# Altium PCB EMG_indicator.PcbDoc
Units mil, origin at the board's own origin, x right, y up, seen from the top; angles counter-clockwise.
Board outline 6000 x 4000 mil, 2 copper layers (Top Layer, Bottom Layer); 53 components, 31 nets, 141 pads, 0 vias.
Unrouted connection lines stored in the file: 104.
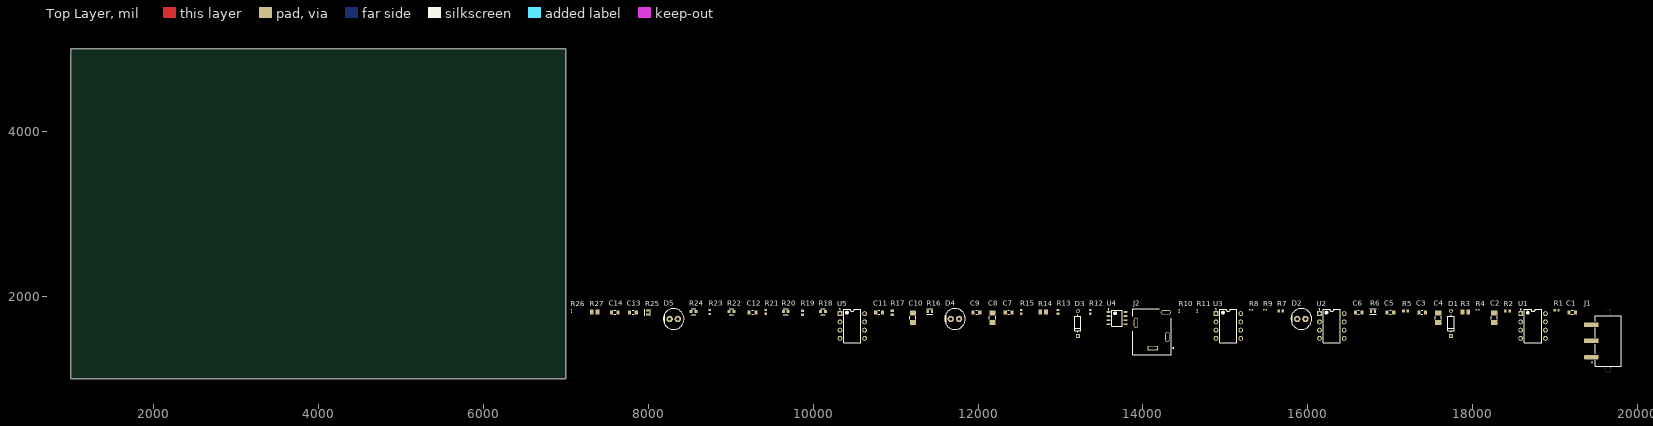
[diagram p0: Top Layer view]
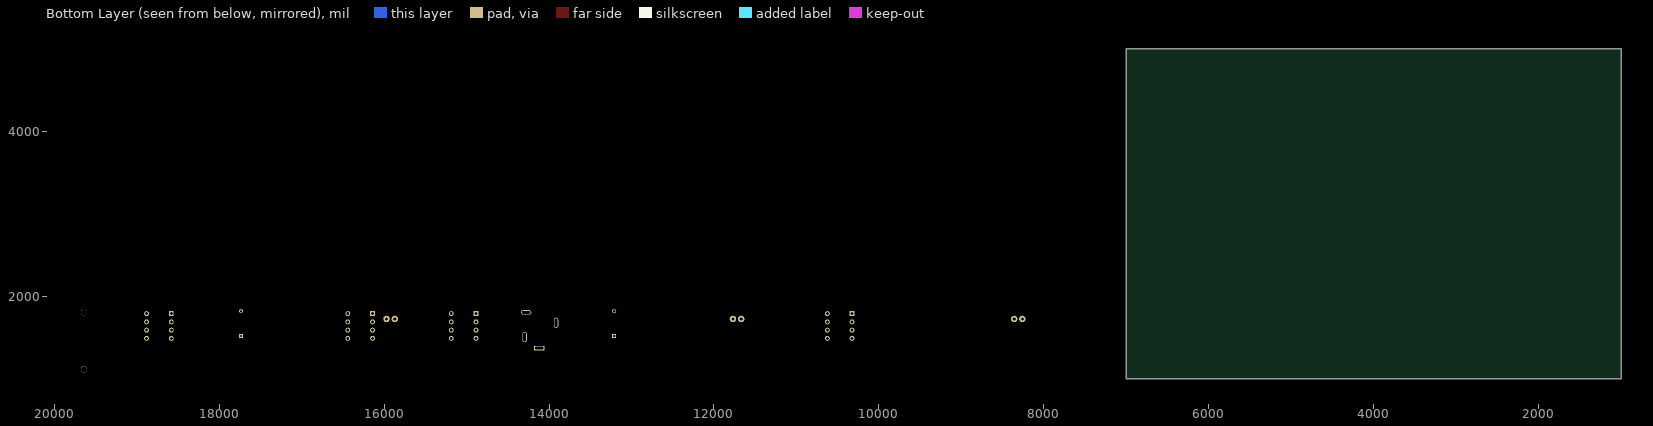
[diagram p1: Bottom Layer view, seen from below]

## Layer stack, top to bottom
Top Solder: solder mask 0.4, Solder Resist, Dk 3.5
Top Layer: signal copper 1.4
Dielectric 1: dielectric 12.6, FR-4, Dk 4.8
Bottom Layer: signal copper 1.4
Bottom Solder: solder mask 0.4, Solder Resist, Dk 3.5

## Board outline
1000,1000 7000,1000 7000,5000 1000,5000

## Design rules (kind name [scope] priority, off if disabled: settings)
Clearance [All] p1: gap=10 ignorepadtopadclearanceinfootprint=FALSE
PolygonConnect [All] p1: connectstyle=Relief reliefconductorwidth=10 reliefentries=4 polygonreliefangle="90 Angle" airgapwidth=10
RoutingVias [All] p1: holewidth=28 width=50 viastyle="Through Hole" minholewidth=28 minwidth=50 maxholewidth=28 maxwidth=50
SolderMaskExpansion [All] p1: expansion=4 istentingtop=FALSE
Width [All] p1: maxlimit=10 minlimit=10 preferedwidth=10
30 further rules are at their usual default settings.

## Components (designator, comment, footprint, x,y, rotation, side; value= is the part's Value field where it differs from the comment)
C1 "100nF" FP-CGA3E-0_3-0_1-IPC_A 19205,1805 r0 top
C2 "68nF" FP-1206-L_3_2_0_2-W_1_6_0-IPC_A 18260,1740 r90 top
C3 "100nF" FP-CGA3E-0_3-0_1-IPC_A 17385,1805 r0 top
C4 "68nF" FP-1206-L_3_2_0_2-W_1_6_0-IPC_A 17580,1740 r90 top
C5 "100nF" FP-CGA3E-0_3-0_1-IPC_A 17000,1805 r0 top
C6 "100nF" FP-CGA3E-0_3-0_1-IPC_A 16615,1805 r0 top
C7 "100nF" FP-CGA3E-0_3-0_1-IPC_A 12370,1805 r0 top
C8 "68nF" FP-1206-L_3_2_0_2-W_1_6_0-IPC_A 12175,1740 r90 top
C9 "100nF" FP-CGA3E-0_3-0_1-IPC_A 11980,1805 r0 top
C10 "68nF" FP-1206-L_3_2_0_2-W_1_6_0-IPC_A 11210,1740 r90 top
C11 "100nF" FP-CGA3E-0_3-0_1-IPC_A 10800,1805 r0 top
C12 "100nF" FP-CGA3E-0_3-0_1-IPC_A 9265,1805 r0 top
C13 "100nF" FP-CGA3E-0_3-0_1-IPC_A 7815,1805 r0 top
C14 "100nF" FP-CGA3E-0_3-0_1-IPC_A 7595,1805 r0 top
D1 "1N4148" FP-017AG-MFG 17735,1670 r90 top
D2 "SFH 4550" FP-SFH_4550-MFG 15920,1725 r0 top
D3 "1N4148" FP-017AG-MFG 13210,1670 r90 top
D4 "SFH 4550" FP-SFH_4550-MFG 11720,1725 r0 top
D5 "SFH 4550" FP-SFH_4550-MFG 8310,1725 r0 top
J1 "691709710303" 691709710303 19640,1460 r90 top
J2 "35RAPC3BH3" FP-35RAPC3BH3-MFG 14110,1500 r90 top
R1 "6.8K" RESC1609X50X30LL10T20 19015,1830 r0 top
R2 "10K" RESC1609X50X30NL8T20 18420,1820 r0 top
R3 "4.7K" RESC2013X70X40NL20T20 17910,1810 r0 top
R4 "5.6K" RESC1005X40X25LL05T05 18055,1835 r0 top
R5 "10K" RESC1609X50X30NL8T20 17185,1820 r0 top
R6 "10K" FP-MCT0603-IPC_C 16790,1815 r0 top
R7 "10K" RESC1609X50X30NL8T20 15670,1820 r0 top
R8 "4.7K" RESC1005X40X25LL05T05 15310,1835 r0 top
R9 "4.7K" RESC1005X40X25LL05T05 15480,1835 r0 top
R10 "4.7K" RESC1005X40X25LL05T05 14440,1820 r90 top
R11 "4.7K" RESC1005X40X25LL05T05 14660,1820 r90 top
R12 "6.8K" RESC1609X50X30LL10T20 13360,1810 r90 top
R13 "3.4K" RESC1609X50X30LL10T20 12970,1810 r90 top
R14 "220" RESC2013X70X40NL20T20 12790,1810 r0 top
R15 "6.8K" RESC1609X50X30LL10T20 12525,1810 r90 top
R16 "10K" FP-MCT0603-IPC_C 11415,1815 r0 top
R17 "10K" RESC1609X50X30NL8T20 10960,1800 r90 top
R18 "47K" FP-CRCW0603-e3-IPC_B 10120,1815 r0 top
R19 "10K" RESC1609X50X30NL8T20 9870,1800 r90 top
R20 "47K" FP-CRCW0603-e3-IPC_B 9670,1815 r0 top
R21 "6.8K" RESC1609X50X30LL10T20 9425,1810 r90 top
R22 "47K" FP-CRCW0603-e3-IPC_B 9010,1815 r0 top
R23 "2.2K" RESC1608X55X25LL10T15 8745,1810 r90 top
R24 "47K" FP-CRCW0603-e3-IPC_B 8550,1815 r0 top
R25 "10K" FP-MCT0603-IPC_C 7990,1805 r90 top
R26 "5.6K" RESC1005X40X25LL05T05 7070,1820 r90 top
R27 "4.7K" RESC2013X70X40NL20T20 7350,1810 r0 top
U1 "TL072CP" P0008A 18730,1640 r0 top
U2 "TL072CP" P0008A 16290,1640 r0 top
U3 "TL072CP" P0008A 15035,1640 r0 top
U4 "LM393DT" STM-SO-8_D_L 13685,1735 r0 top
U5 "TL072CP" P0008A 10475,1640 r0 top

## Footprints (in the part's own frame and the unit in brackets; to place one, negate y for a bottom-side part, rotate by r counter-clockwise, add the part's x,y. Pads: shape width x height; smd on the part's side, far side on the other; paste and mask are expansions set on the pad)
691709710303 [mm] "Horizontal Entry SMT with Pressure Clamp, pitch 5mm, 03p"
  rrect50% 1.4x4.5 smd: 1(-5,5.15)
  rect 1.4x4.5 smd: 2(0,5.15) 3(5,5.15)
  round 1.9 hole 1.9 unplated: M1(-8.8,0) M2(8.8,0)
  silkscreen extent -7.75,-4 7.75,5.1, body extent -9.5,-4 9.5,7, height 9.95
FP-017AG-MFG [mm]
  rect 1.2x1.2 hole 0.7 paste-2539.97 mask+0: 1(-3.813,0)
  round 1.2 hole 0.7 paste-2539.97 mask+0: 2(3.813,0)
  silkscreen extent -2.68,-0.95 2.68,0.95, body extent -4.51,-1.05 4.51,1.05, height 0.25
FP-35RAPC3BH3-MFG [mil]
  rect 53.62x123.62 hole 100 slot 30 at 0 deg paste-99999 mask+0: 1(-127.5,-9.5)
  rrect100% 123.62x53.62 hole 100 slot 30 at 90 deg paste-99999 mask+0: 2(178.77,195.5) 5(7.37,-186.41)
  rrect100% 53.62x123.62 hole 100 slot 30 at 0 deg paste-99999 mask+0: 4(305.5,-166.5)
  silkscreen extent -206,-261 347,232, body extent -351,-235 351,235, height 10
FP-1206-L_3_2_0_2-W_1_6_0-IPC_A [mil]
  rect 59.24x75.05 smd paste+0 mask+0: 1(-59.09,0) 2(59.09,0)
  silkscreen extent -18,-38 18,38, body extent -108,-57 108,57, height 10
FP-CGA3E-0_3-0_1-IPC_A [mm]
  rect 0.956x1.206 smd paste+0 mask+0: 1(-1.025,0) 2(1.025,0)
  silkscreen extent -0.25,-0.6 0.25,0.6, body extent -2,-1.1 2,1.1, height 0.25
FP-CRCW0603-e3-IPC_B [mil]
  rect 36.81x37.88 smd paste+0 mask+0: 1(-28.17,0) 2(28.17,0)
  silkscreen extent -30,-37 30,35, body extent -56,-29 56,29, height 10
FP-MCT0603-IPC_C [mil]
  rect 26.13x33.94 smd paste+0 mask+0: 1(-24.78,0) 2(24.78,0)
  silkscreen extent -38,-34 38,34, body extent -42,-23 42,23, height 10
FP-SFH_4550-MFG [mm]
  round 2 hole 1 paste-2539.97 mask+0: 1(-1.27,0) 2(1.27,0)
  silkscreen extent -3.2,-3.2 3.2,3.2, body extent -3.05,-3.05 3.05,3.05, height 0.25
P0008A [mm] "DIP, 8-Leads, Body 10.15x6.6mm, Pitch 2.54mm"
  rect 1.5x1.5 hole 0.9: 1(-3.81,3.81)
  round 1.5 hole 0.9: 2(-3.81,1.27) 3(-3.81,-1.27) 4(-3.81,-3.81) 5(3.81,-3.81) 6(3.81,-1.27) 7(3.81,1.27) 8(3.81,3.81)
  silkscreen extent -3.93,-5.1 2.65,5.23, body extent -3.95,-5.07 3.95,5.07, height 5.08
RESC1005X40X25LL05T05 [mm] "Chip Resistor, 2-Leads, Body 1.00x0.50mm, IPC High Density"
  rect 0.45x0.45 smd: 1(-0.4,0) 2(0.4,0)
  body extent -0.53,-0.27 0.53,0.28, height 0.4
RESC1608X55X25LL10T15 [mm] "Chip Resistor, 2-Leads, Body 1.60x0.80mm, IPC High Density"
  rect 0.6x0.8 smd: 1(-0.65,0) 2(0.65,0)
  body extent -0.85,-0.45 0.85,0.45, height 0.55
RESC1609X50X30LL10T20 [mm] "Chip Resistor, 2-Leads, Body 1.55x0.85mm, IPC High Density"
  rect 0.7x0.85 smd: 1(-0.575,0) 2(0.575,0)
  body extent -0.82,-0.48 0.82,0.48, height 0.5
RESC1609X50X30NL8T20 [mm] "Chip Resistor, 2-Leads, Body 1.65x0.95mm, IPC Medium Density"
  rect 0.8x0.95 smd: 1(-0.65,0) 2(0.65,0)
  body extent -0.82,-0.48 0.82,0.48, height 0.5
RESC2013X70X40NL20T20 [mm] "Chip Resistor, 2-Leads, Body 2.2x1.35mm, IPC Medium Density"
  rect 1.15x1.45 smd: 1(-0.875,0) 2(0.875,0)
  body extent -1.1,-0.72 1.1,0.72, height 0.7
STM-SO-8_D_L [mm] "SOIC, 8-Leads, Body 5x4mm, Pitch 1.27mm, IPC High Density"
  oval 1.25x0.55 smd: 1(-2.625,1.905) 2(-2.625,0.635) 3(-2.625,-0.635) 4(-2.625,-1.905) 5(2.625,-1.905) 6(2.625,-0.635) 7(2.625,0.635) 8(2.625,1.905)
  silkscreen extent -2.75,-2.5 1.6,2.85, body extent -3,-2.5 3,2.5, height 1.75

## Part data
C1 C3 C5 C6 C7 C9 C11 C12 C13 C14: library part CMP-2000-07546-2, "Cap Ceramic 100nF 50V X7R 10% Pad SMD 0603 +125°C Automotive T/R", Case Code (Imperial)=0603, Case Code (Metric)=1608, Dielectric=X7R, Max Operating Temperature=125°C, Min Operating Temperature=-55°C, Package Quantity=1, Ratings=AEC-Q200, Tolerance=10%, Voltage=50V, Capacitance=100nF, Case/Package=0603, Composition=Ceramic, Depth=0.8mm, Height=0.8mm, Lead Free="Lead Free", Length=1.6mm, Mount="Surface Mount", Packaging="Tape and Reel", Radiation Hardening=No, REACH SVHC="No SVHC", Termination=SMD/SMT, Thickness=0.035inch, Voltage Rating=50V, Voltage Rating (DC)=50V, Weight=7.1E-05oz, Width=0.8mm
C2 C4 C8 C10: library part CMP-04427-019044-1, "General Purpose Ceramic Capacitor, 1206, 68nF, 10%, X7R, 15%, 100V", Case Code (Imperial)=1206, Case Code (Metric)=3216, Dielectric=X7R, Max Operating Temperature=125°C, Min Operating Temperature=-55°C, Package Quantity=1, Tolerance=10%, Voltage=100V, Capacitance=68nF, Case/Package=1206, Construction=Flat, Depth=1.6mm, Dissipation Factor=2.5%, Height=0.94mm, Lead Free="Lead Free", Length=3.2mm, Mount="Surface Mount", Number of Pins=2, Packaging="Tape and Reel", Radiation Hardening=No, REACH SVHC="No SVHC", RoHS Compliant=Yes, Series=-, Termination=SMD/SMT, Thickness=0.037inch, Voltage Rating=100V, Voltage Rating (DC)=100V, Width=0.063inch
D1 D3: library part CMP-07163-000046-1, "DIODE GEN PURP 100V 200MA DO35", Average Rectified Current=200mA, Capacitance=4pF, Case/Package=DO-35, Current=4A, Forward Current=300mA, Forward Voltage=1V, Max Forward Surge Current (Ifsm)=1A, Max Operating Temperature=175°C, Max Power Dissipation=500mW, Max Repetitive Reverse Voltage (Vrrm)=100V, Max Reverse Current=5uA, Min Operating Temperature=-65°C, Package Quantity=2000, Contact Plating=Tin, Current Rating=200mA, Diameter=1.91mm, Element Configuration=Single, Height=4.56mm, Lead Free="Lead Free", Length=4.56mm, Max Reverse Voltage (DC)=100V, Max Surge Current=4A, Mount="Through Hole", Number of Pins=2, Output Current=200mA, Outside Diameter=1.85mm, Packaging=Bulk, Peak Non-Repetitive Surge Current=4A, Polarity=Standard, Power Dissipation=500mW, Radiation Hardening=No, REACH SVHC="No SVHC", Recovery Time=4ns, Reverse Recovery Time=4ns, Reverse Voltage=100V, Series=-, Voltage=100V, Voltage Rating (DC)=100V, Weight=0.01lb, Width=1.91mm
D2 D4 D5: library part CMP-62016-000011-1, "EMITTER IR 860NM 100MA RADIAL", Colour=Infrared, Forward Current=100mA, Forward Voltage=1.5V, Manufacturer="Osram Opto", Reverse Voltage=5V, Temperature="-40°C to +100°C", Temperature Range High=+100°C, Temperature Range Low=-40°C, Automotive=No, Category=Diode, ComponentLink2Description=Datasheet, ComponentLink2URL=https://dammedia.osram.info/media/resource/hires/osram-dam-5580407/SFH%204550_EN.pdf, Device Class L1=Optoelectronics, Device Class L2=LEDs, Device Class L3=unset, Digikey Description="EMITTER IR 860NM 100MA RADIAL", Lead Free=Yes, Led Orientation=Straight, Manufacturer Part Number="SFH 4550", Mouser Description="Infrared Emitters - High Power Infrared 850 nm HALF ANGLE +/-3DEG", Octopart=https://octopart.com/sfh+4550-osram+opto-55410894, Package="SFH 4550", Peak Emmision Wavelength=860nm, RoHS=TRUE, Viewing Angle=6°
J1: library part CMP-1502-03336-2, "Battery connector", Color=Black, Current=6A, Flammability Rating="UL94 V-0", Max Operating Temperature=130°C, Min Operating Temperature=-40°C, Voltage=300V, Connector Type=Screw, Contact Material=Nickel, Contact Plating=Tin, Current Rating=6A, Height=10.2mm, Housing Material=Nylon, Lead Pitch=5mm, Length=15mm, Mount="Surface Mount", NexarPartId=34171770, Number of Contacts=3, Number of Levels=1, Number of Pins=3, Number of Positions=3, Number of Positions Per Level=3, Number of Rows=1, Packaging=Digi-Reel®, Pitch=5mm, Plating=Steel, REACH SVHC=Unknown, RoHS=Compliant, Termination=Screw, Voltage Rating=300V, Wire Gauge (Max)=30AWG, Wire Gauge (Min)=14AWG, Wire/Cable Gauge=30AWG
J2: library part CMP-47983-000003-1, "CONN JACK STEREO 3.5MM R/A", Body Color=Black, Package Quantity=1, Voltage Rating=500V, Body Material=Brass, Color=Black, Contact Material="Copper Alloy", Contact Plating=Silver, Gender=Female, Housing Material=PBT, Lead Free="Lead Free", Mount="Through Hole", Number of Ports=1, Number of Positions=3, Number of Terminals/Pins=3, Orientation="Right Angle", Packaging=Bulk, RoHS Compliant=Yes, Series=35, Shielding=Unshielded, Termination=Solder
R1 R12 R15 R21: library part CMP-2000-03550-1, Manufacturer="Vishay Dale", Part Number=CRCW06036K80FKEA
R2 R5 R7 R17 R19: library part CMP-1666-00005-4, "Chip Resistor, 10 KOhm, +/- 1%, 100 mW, -55 to 155 degC, 0603 (1608 Metric), RoHS, Tape and Reel", Manufacturer="Vishay Semiconductor", Max Operating Temperature="155 degC", Min Operating Temperature="-55 degC", Package Quantity=5000, Voltage Rating="75 V", ComponentLink1Description="Manufacturer URL", ComponentLink1URL=http://www.vishay.com/, ComponentLink2Description=Datasheet, ComponentLink2URL=https://datasheet.ciiva.com/11809/0900766b80d98afc-11809037.pdf, DatasheetVersion=06/2012, Height="0.45 mm", Length="1.55 mm", Mounting Technology="Surface Mount", PackageDescription="2-Pin Surface Mount Device, Body 1.575 x 0.85 mm", PackageReference=0603, Packaging="Tape and Reel", REACH SVHC=Unknown, RoHSCompliant=true
R3 R27: library part CMP-2001-00550-5, "Chip Resistor, 4.7 KOhm, +/- 1%, 0.125 W, -55 to 155 degC, 0805 (2012 Metric), RoHS, Tape and Reel", Manufacturer=Panasonic, Max Operating Temperature="155 degC", Min Operating Temperature="-55 degC", Package Quantity=5000, Voltage Rating="150 V", ComponentLink1Description="Manufacturer URL", ComponentLink1URL=http://www.panasonic.com/, ComponentLink2Description=Datasheet, ComponentLink2URL=http://industrial.panasonic.com/cdbs/www-data/pdf/RDA0000/AOA0000C86.pdf, DatasheetVersion=04/2015, Height="0.6 mm", Length="2 mm", Mount="Surface Mount", Mounting Technology="Surface Mount", PackageDescription="2-Pin Surface Mount Device, Body 2 x 1.25 mm", PackageReference=0805, Packaging="Tape and Reel", Pins=2, REACH SVHC=Yes, RoHSCompliant=true
R4 R26: library part CMP-2002-00121-1, Manufacturer="Vishay Dale", Part Number=CRCW04025K60FKED
R6 R16 R25: library part CMP-02407-000418-1, "RES SMD 100 OHM 1% 1/8W 0603", Case Code (Imperial)=0603, Case Code (Metric)=1608, Max Operating Temperature=125°C, Max Power Dissipation=125mW, Min Operating Temperature=-55°C, Package Quantity=1, Power Rating=100mW, Resistance=10kR, Temperature Coefficient=50ppm/°C, Tolerance=1%, Voltage Rating=75V, Case/Package=0603, Composition="Thin Film", Contact Plating=Tin, Depth=0.85mm, Height=0.022inch, Lead Free="Lead Free", Length=1.55mm, Military Standard=Not, Mount="Surface Mount", Number of Terminations=2, Packaging="Tape and Reel", Radiation Hardening=No, Voltage Rating (DC)=75V, Width=0.8mm
R8 R9 R10 R11: library part CMP-2002-01154-4, "Chip Resistor, 4.7 KOhm, +/- 1%, 0.1 W, -55 to 155 degC, 0402 (1005 Metric), RoHS, Tape and Reel", Case Code (Imperial)=0402, Case Code (Metric)=1005, Max Operating Temperature="155 degC", Min Operating Temperature="-55 degC", Package Quantity=1, PartNumber=ERJ-2RKF4701X, Power Rating="100 mW", Resistance="4.7 KOhm", Tolerance=1%, Voltage Rating="50 V", Case\/Package=0402, ComponentLink1Description="Manufacturer URL", ComponentLink1URL=http://www.panasonic.com/, ComponentLink2Description=Datasheet, ComponentLink2URL=http://industrial.panasonic.com/cdbs/www-data/pdf/RDA0000/AOA0000C86.pdf, DatasheetVersion=04/2015, Height="0.35 mm", Length="1 mm", Mount="Surface Mount", Mounting Technology="Surface Mount", PackageDescription="2-Pin Surface Mount Device, Body 1 x 0.5 mm", PackageReference=0402, Packaging="Cut Tape", Pins=2, Radiation Hardening=No, REACH SVHC=Yes, RoHSCompliant=true, Width="0.5 mm"
R13: library part CMP-2000-03303-1, Manufacturer="Vishay Dale", Part Number=CRCW06033K40FKEA
R14: library part CMP-2001-00044-1, Manufacturer=Panasonic, Part Number=ERJ6ENF2200V
R18 R20 R22 R24: library part CMP-2000-03379-3, "RES SMD 47K OHM 1% 1/10W 0603", Case Code (Imperial)=0603, Case Code (Metric)=1608, Max Operating Temperature=155°C, Max Power Dissipation=100mW, Min Operating Temperature=-55°C, Package Quantity=5000, Resistance=47kR, Resistance Tolerance=1%, Resistor Type="Thick Film", Temperature Coefficient=100ppm/°C, Voltage Rating=75V, Case/Package=0603, Construction=Rectangular, Contact Plating=Tin, Depth=0.85mm, Features="Automotive AEC-Q200", Height=0.45mm, Lead Free="Lead Free", Length=1.55mm, Military Standard=Not, Mount="Surface Mount", Number of Terminations=2, Packaging="Tape and Reel", Power Rating=100mW, Radiation Hardening=No, RoHS Compliant=Yes, Series=CRCW, Size Code=0603, Technology="THICK FILM", Termination=SMD/SMT, Tolerance=1%, Voltage Rating (DC)=75V, Weight=7.1E-05oz, Width=0.85mm
R23: library part CMP-2000-06934-1, "Thick Film Resistor, 2.2 KOhm, 100 mW, 50 V, +/- 1%, -55 to 155 degC, 2-Pin SMD (0603), RoHS, Tape and Reel", Case Code - in=0603, Case Code - mm=1608, Manufacturer=Yageo, Operating Temperature Range=-55Cto+155C, Package Description="2-Pin Surface Mount Device, Body 1.6 x 0.8 mm", Power Rating=100mW, Resistance=2.2kOhms, Temperature Coefficient=100PPM/C, Tolerance=1%, Voltage Rating=50V, Datasheet URL=http://www.yageo.com/documents/recent/PYu-RC_Group_51_RoHS_L_7.pdf, Datasheet Version="Rev. 7, 05/2017", Manufacturer URL=http://www.yageo.com/, Mounting Technology=SurfaceMount, Package Reference=0603, Packaging=Reel, Product=ThickFilmResistorsGeneralPurpose, Series=RC, Termination Style=SMD/SMT
U1 U2 U3 U5: library part CMP-0017-00950-2, "Dual Low-Noise JFET-Input General-Purpose Operational Amplifier, 7 to 36 V, 0 to 70 degC, 8-pin DIP (P8), Pb-Free (RoHS)", Manufacturer="Texas Instruments", Rating=Catalog, Total Supply Voltage(Max)(+5V is 5, +/-5V is 10)=36, Total Supply Voltage(Min)(+5V is 5, +/-5V is 10)=7, CMRR(Min)(dB)=70, Code_JEDEC=MS-001, ComponentLink1Description="Manufacturer URL", ComponentLink1URL=http://www.ti.com/, ComponentLink2Description=Datasheet, ComponentLink2URL=http://www.ti.com/lit/ds/symlink/tl072.pdf, ComponentLink3Description="Package Specification", ComponentLink3URL=http://www.ti.com/litv/pdf/mpdi001b, DatasheetVersion=SLOS080J, Eco-Plan="Pb-Free (RoHS)", GBW(Typ)(MHz)=3, IIB(Max)(pA)=200, Iq per channel(Max)(mA)=2.5, Mounting Technology="Through Hole", Number of Channels=2, Offset Drift(Typ)(uV/C)=18, PackageDescription="8-Pin Plastic In-Line, Body 9.59 x 6.35 mm, Pitch 2.54 mm", PackageReference=P0008A, PackageVersion="4040082/E, 04/2010", PartNumber=TL072CP, Slew Rate(Typ)(V/us)=13, Sub Family="General Purpose Amplifier, High Supply Voltage Amplifier (>=30V)", Vio (25C)(Max)(mV)=10, Vn at 1kHz(Typ)(nV/rtHz)=18
U4: library part CMP-2000-06550-1, "Low-Power, Dual-Voltage Comparator, 2 to 36 V, 0 to 70 degC, 8-Pin SOIC (SO), RoHS, Tape and Reel", Current - Input Bias (Max)=0.25µA@5V, Current - Output (Typ)=18mA@5V, Current - Quiescent (Max)=2.5mA, Manufacturer=STMicroelectronics, Operating Temperature=0°C~70°C, Package / Case="8-SOIC(0.154\",3.90mmWidth)", Package Description="8-Pin Small Outline Integrated Circuit, Body 4.9 x 3.9 mm, Pitch 1.27 mm", Package Reference=SO-8, Standard Package=2,500, Supplier Device Package=8-SO, Voltage - Input Offset (Max)=5mV@30V, Voltage - Supply, Single/Dual (±)=2V~36V,±1V~18V, Category=IntegratedCircuits(ICs), Datasheet URL=http://www.st.com/content/ccc/resource/technical/document/datasheet/group1/b4/cc/cf/13/18/28/44/f5/CD00000465/files/CD00000465.pdf/jcr:content/translations/en.CD00000465.pdf, Datasheet Version="Rev. 15, 02/2016", EDA / CAD Models=DownloadfromAcceleratedDesigns, Family=Linear-Comparators, Manufacturer URL=http://www.st.com/, Mounting Technology=SurfaceMount, Mounting Type=SurfaceMount, Number of Elements=2, Online Catalog=Comparators-2elements, Other Names=497-1593-2, Other Related Documents=LM393ViewAllSpecificationsLM393ViewAllSpecifications, Output Type=CMOS,DTL,ECL,MOS,Open-Collector,TTL, Packaging=Tape&Reel(TR), Type=GeneralPurpose

## Nets (pads, with @x,y where several pads share a name; then routed paths per layer and width w, separated by ;. In a path a pad name is that pad's centre, name@x,y a point inside that pad or via, vN(x,y) a via of type N, cw(c..) or ccw(c..) an arc to the next point about the centre after c; other vN are vias at no path point)
GND: C1.2 C3.2 C5.2 C6.2 C7.2 C8.2 C9.2 C10.2 C11.2 C12.1 C13.2 C14.2 J1.2 J2.5 R4.2 R22.1 R23.1 R24.1 R25.2 R26.1 U2.5 U5.3
NetC2_1: C2.1 R8.2 R9.1
NetC2_2: C2.2 R10.1 R18.1 U1.7
NetC4_1: C4.1 R10.2 R11.1
NetC4_2: C4.2 R12.1 R20.1 R21.1 U3.1
NetC8_1: C8.1 R9.2 U1.5
NetC10_1: C10.1 R11.2 U3.3
NetD1_1: D1.1 R1.1 R12.2 U2.6
NetD1_2: D1.2 D3.1 U2.7
NetD2_1: D2.1 D4.2 U4.1
NetD2_2: D2.2 R3.2 R4.1
NetD3_2: D3.2 R1.2 R13.1
NetD4_1: D4.1 D5.2 U4.7
NetD5_1: D5.1 R26.2 R27.1
NetJ2_1: J2.1 U1.3
NetJ2_2: J2.2 U3.5
NetR2_1: R2.1 R8.1 U2.1
NetR2_2: R2.2 R5.1 U2.2
NetR5_2: R5.2 R7.2 U1.1
NetR6_2: R6.2 R16.1 U4.2
NetR7_1: R7.1 R14.2 U1.2
NetR13_2: R13.2 R15.1 R21.2 U5.2
NetR14_1: R14.1 R17.2 U3.6
NetR15_2: R15.2 U4.3 U4.5 U5.1
NetR16_2: R16.2 R25.1 U4.6
NetR17_1: R17.1 R19.2 U3.7
NetR18_2: R18.2 R22.2 U1.6
NetR19_1: R19.1 R23.2 U2.3
NetR20_2: R20.2 R24.2 U3.2
VCC+: C1.1 C3.1 C7.1 C11.1 C14.1 J1.1 R3.1 R6.1 U1.8 U2.8 U3.8 U4.8 U5.8
VCC-: C5.1 C6.1 C9.1 C12.2 C13.1 J1.3 R27.2 U1.4 U2.4 U3.4 U4.4 U5.4
pads on no net: J1.M1 J1.M2 J2.4 U5.5 U5.6 U5.7